# Altium PCB PCB1.PcbDoc
Units mm, origin at the board's own origin, x right, y up, seen from the top; angles counter-clockwise.
Board outline 68.96 x 54.74 mm, 2 copper layers (Top Layer, Bottom Layer); 22 components, 0 nets, 57 pads, 0 vias.
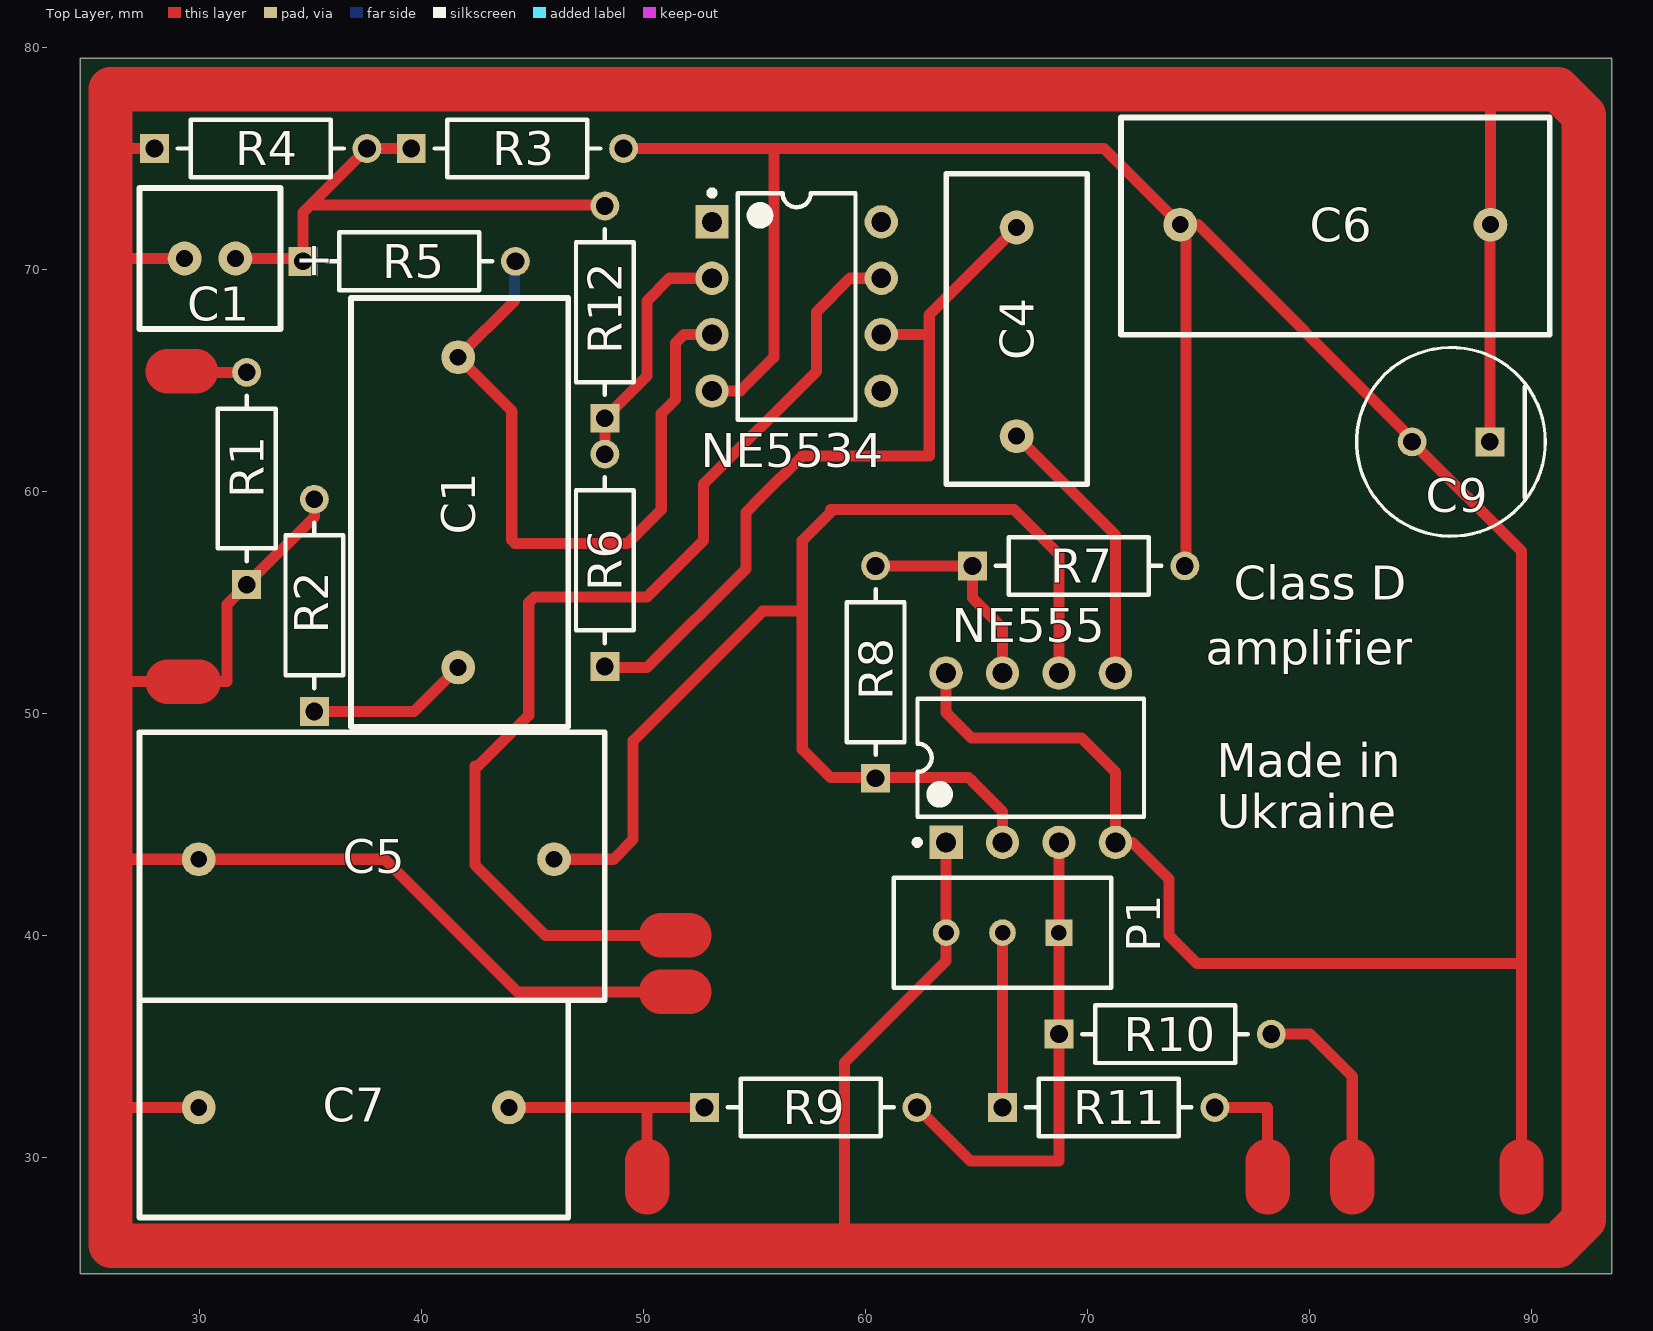
[diagram p0: Top Layer view]
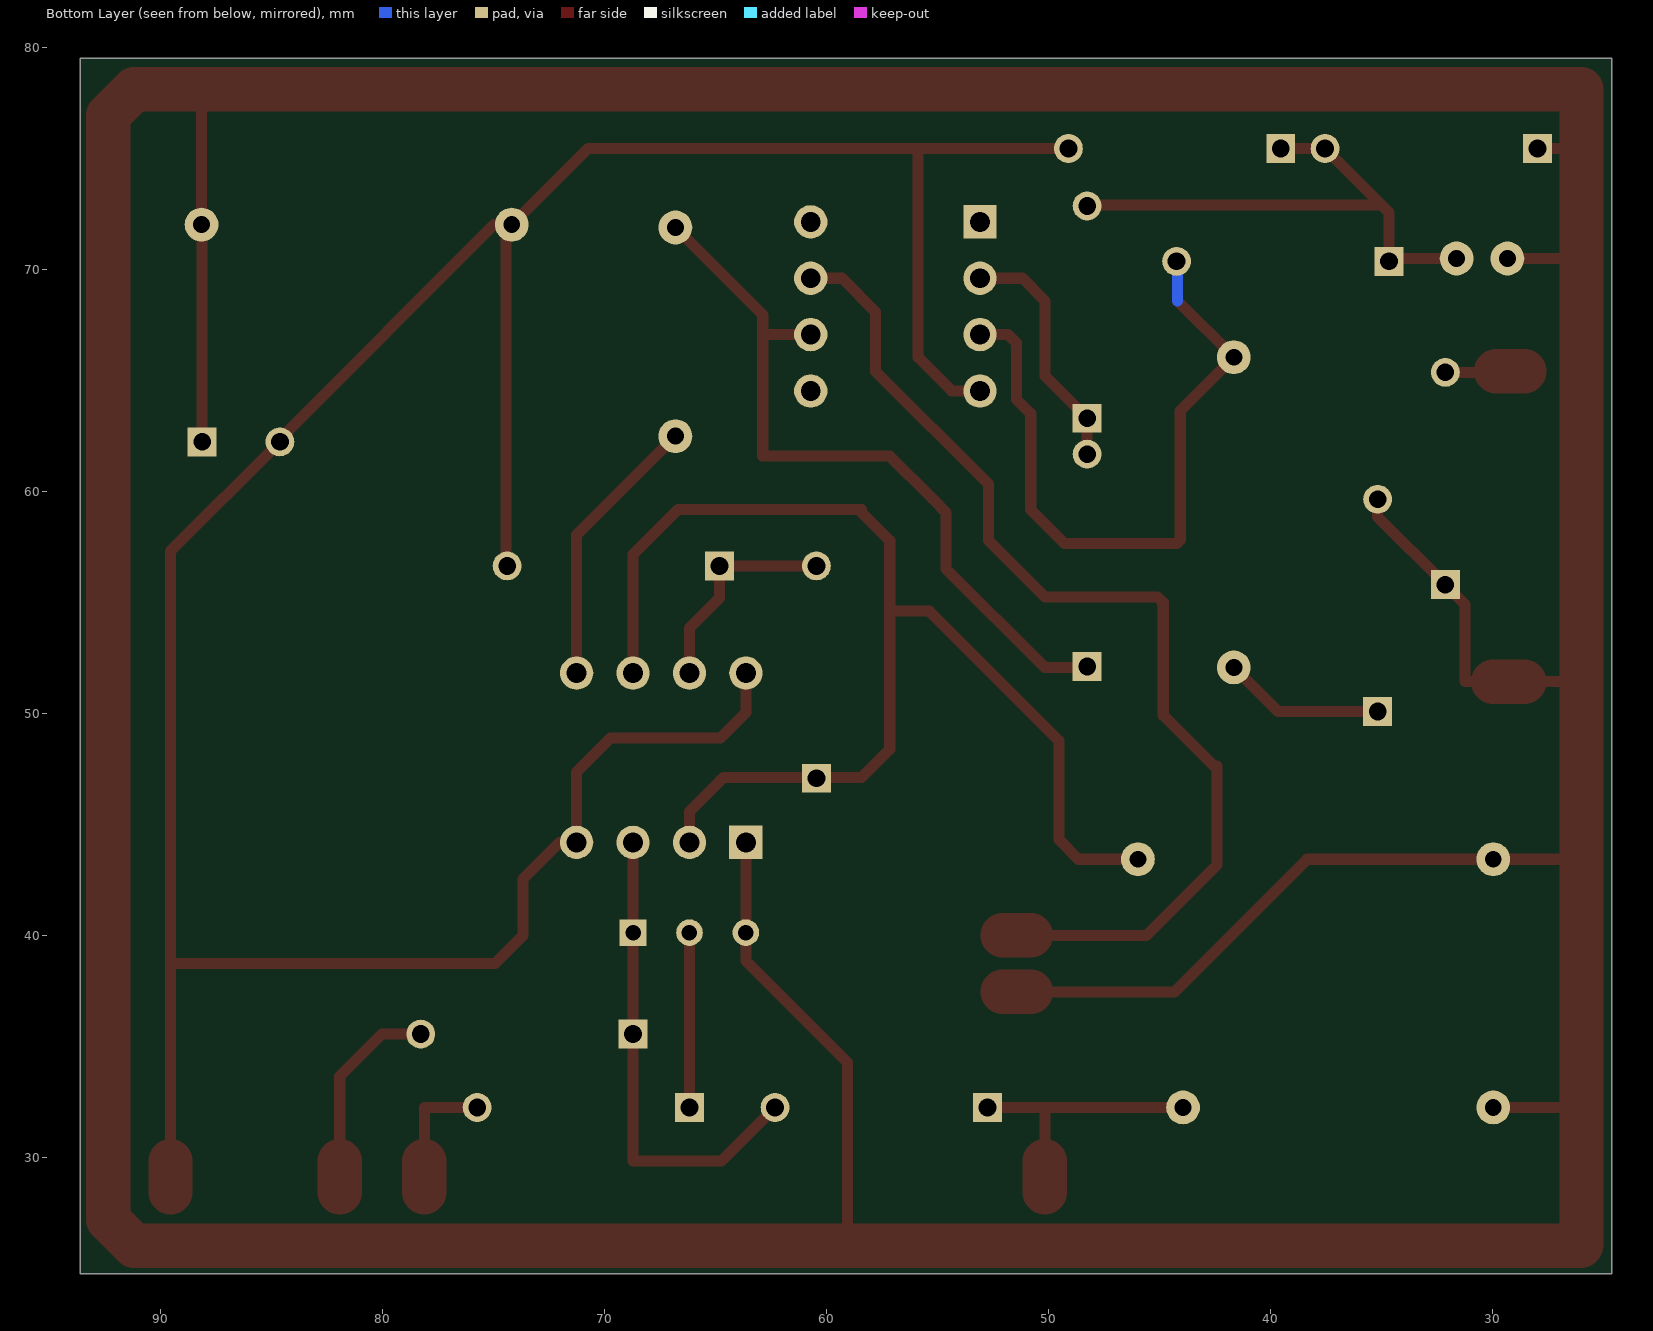
[diagram p1: Bottom Layer view, seen from below]

## Layer stack, top to bottom
Top Solder: solder mask 0.0102, Solder Resist, Dk 3.5
Top Layer: signal copper 0.0356
Dielectric 1: dielectric 0.32, FR-4, Dk 4.8
Bottom Layer: signal copper 0.0356
Bottom Solder: solder mask 0.0102, Solder Resist, Dk 3.5

## Board outline
24.638,24.765 93.599,24.765 93.599,79.502 24.638,79.502

## Design rules (kind name [scope] priority, off if disabled: settings)
Clearance [All] p1: gap=0.254 ignorepadtopadclearanceinfootprint=FALSE except(0: Arc-Hole Track-Hole SMDPad-Hole THPad-Hole Via-Hole Fill-Hole Poly-Hole Region-Hole Text-Hole)
PolygonConnect [All] p1: connectstyle=Relief reliefconductorwidth=0.254 reliefentries=4 polygonreliefangle="90 Angle" airgapwidth=0.254
RoutingVias [All] p1: holewidth=0.711 width=1.27 viastyle="Through Hole" minholewidth=0.711 minwidth=1.27 maxholewidth=0.711 maxwidth=1.27
SolderMaskExpansion [All] p1: expansion=0.102 istentingtop=FALSE
Width [All] p1: maxlimit=0.254 minlimit=0.254 preferedwidth=0.254
30 further rules are at their usual default settings.

## Components (designator, comment, footprint, x,y, rotation, side; value= is the part's Value field where it differs from the comment)
C1 "Comment" MPX153K2EB-Hitano 41.91,59.563 r90 top
C1 "Comment" ESX101M16B-Hitano 30.48,70.485 r0 top
C4 "Comment" MPX472K2FBA-Hitano 66.802,67.31 r90 top
C5 "Comment" MER684K2EB-Hitano 29.845,43.434 r0 top
C6 "Comment" MPX153K2EB-Hitano 81.661,71.755 r0 top
C7 "Comment" MPX154K2FB-Hitano 37.465,32.004 r0 top
C9 "Comment" FP-EEU-FC1V221L-MFG 86.36,62.23 r180 top
NE555 "Comment" P0008A 67.437,48.006 r90 top
NE5534 "Comment" P0008A 56.896,68.326 r0 top
P1 "Comment" FP-3296W-MFG 66.167,40.127 r90 top
R1 "Comment" FP-CF14-MFG 35.179,54.864 r90 top
R2 "Comment" FP-CF14-MFG 32.131,60.579 r90 top
R3 "Comment" FP-CF14-MFG 44.323,75.438 r0 top
R4 "Comment" FP-CF14-MFG 32.766,75.438 r0 top
R5 "Comment" FP-CF14-MFG 39.451,70.358 r0 top
R6 "Comment" FP-CF14-MFG 48.26,56.896 r90 top
R7 "Comment" FP-CF14-MFG 69.596,56.642 r0 top
R8 "Comment" FP-CF14-MFG 60.452,51.862 r90 top
R9 "Comment" FP-CF14-MFG 57.531,32.258 r0 top
R10 "Comment" FP-CF14-MFG 73.487,35.56 r0 top
R11 "Comment" FP-CF14-MFG 70.947,32.258 r0 top
R12 "Comment" FP-CF14-MFG 48.26,68.072 r90 top

## Footprints (in the part's own frame and the unit in brackets; to place one, negate y for a bottom-side part, rotate by r counter-clockwise, add the part's x,y. Pads: shape width x height; smd on the part's side, far side on the other; paste and mask are expansions set on the pad)
ESX101M16B-Hitano [mil]
  round 60 hole 30: 7(45,0) 8(-45,0)
  silkscreen extent -125,-125 125,125, body extent -124,-124 124,124, height 433
FP-3296W-MFG [mm]
  rect 1.2x1.2 hole 0.7 paste-1000 mask+0: 1(0.005,-2.54)
  round 1.2 hole 0.7 paste-1000 mask+0: 2(0.005,0) 3(0.005,2.54)
  silkscreen extent -2.48,-4.89 2.48,4.89, body extent -2.58,-4.99 2.58,4.99, height 0.25
FP-CF14-MFG [mm]
  rect 1.3x1.3 hole 0.8 paste-1000 mask+0: 1(-4.78,0)
  round 1.3 hole 0.8 paste-1000 mask+0: 2(4.78,0)
  silkscreen extent -3.73,-1.3 3.73,1.3, body extent -5.53,-1.4 5.53,1.4, height 0.25
FP-EEU-FC1V221L-MFG [mm]
  rect 1.3x1.3 hole 0.8 paste-1000 mask+0: 1(-1.75,0)
  round 1.3 hole 0.8 paste-1000 mask+0: 2(1.75,0)
  silkscreen extent -4.25,-4.25 4.25,4.25, body extent -4,-4 4,4, height 16.5
MER684K2EB-Hitano [mil]
  round 60 hole 30: 1(5,0) 2(635,0)
  silkscreen extent -100,-250 725,225, body extent -34,-197 675,177, height 827
MPX153K2EB-Hitano [mil]
  round 60 hole 30: 5(-295,10) 6(255,10)
  silkscreen extent -400,-185 360,200, body extent -374,-160 334,175, height 571
MPX154K2FB-Hitano [mil]
  round 60 hole 30: 5(-295,10) 6(255,10)
  silkscreen extent -400,-185 360,200, body extent -374,-160 334,175, height 571
MPX472K2FBA-Hitano [mil]
  round 60 hole 30: 3(180,0) 4(-190,0)
  silkscreen extent -275,-125 275,125, body extent -250,-98 242,98, height 433
P0008A [mm] "DIP, 8-Leads, Body 10.15x6.6mm, Pitch 2.54mm"
  rect 1.5x1.5 hole 0.9: 1(-3.81,3.81)
  round 1.5 hole 0.9: 2(-3.81,1.27) 3(-3.81,-1.27) 4(-3.81,-3.81) 5(3.81,-3.81) 6(3.81,-1.27) 7(3.81,1.27) 8(3.81,3.81)
  silkscreen extent -3.93,-5.1 2.65,5.23, body extent -3.95,-5.07 3.95,5.07, height 5.08

## Nets (pads, with @x,y where several pads share a name; then routed paths per layer and width w, separated by ;. In a path a pad name is that pad's centre, name@x,y a point inside that pad or via, vN(x,y) a via of type N, cw(c..) or ccw(c..) an arc to the next point about the centre after c; other vN are vias at no path point)
pads on no net: C1.5 C1.6 C1.7 C1.8 C4.3 C4.4 C5.1 C5.2 C6.5 C6.6 C7.5 C7.6 C9.1 C9.2 NE555.1 NE555.2 NE555.3 NE555.4 NE555.5 NE555.6 NE555.7 NE555.8 NE5534.1 NE5534.2 NE5534.3 NE5534.4 NE5534.5 NE5534.6 NE5534.7 NE5534.8 P1.1 P1.2 P1.3 R1.1 R1.2 R2.1 R2.2 R3.1 R3.2 R4.1 R4.2 R5.1 R5.2 R6.1 R6.2 R7.1 R7.2 R8.1 R8.2 R9.1 R9.2 R10.1 R10.2 R11.1 R11.2 R12.1 R12.2
copper on no net: | length 793.1
  Top Layer w0.254: 25.998,26.072 26.035,26.035 ; 25.998,78.09 26.014,78.105 ; 26.035,32.385 26.162,32.258 ; 29.845,65.405 29.891,65.359 ; 34.544,70.485 34.671,70.358 ; 37.846,78.867 37.973,78.74 38.227,78.486 57.277,78.486 ; 38.354,43.434 43.942,37.846 ; 42.418,47.625 42.545,47.625 ; 44.895,55.054 45.085,55.245 ; 48.26,52.116 48.306,52.07 ; 48.26,63.292 48.56,62.992 ; 58.42,59.055 58.42,59.182 ; 60.417,47.117 60.452,47.082 ; 62.23,32.339 62.311,32.258 ; 64.643,47.117 64.77,46.99 ; 74.168,72.009 74.422,71.755 ; 74.376,56.642 74.422,56.688 ; 81.788,29.972 81.915,29.845 ; 88.11,71.981 88.138,72.009 ; 52.451,69.596 53.086,69.596 52.451,69.596
  Top Layer w0.5: 25.908,51.435 28.575,51.435 ; 25.908,70.485 29.337,70.485 ; 25.908,75.438 27.986,75.438 ; 25.998,43.434 29.972,43.434 38.354,43.434 44.323,37.465 49.53,37.465 50.8,37.465 ; 26.162,32.258 29.972,32.258 ; 29.891,65.359 32.131,65.359 ; 29.972,51.435 31.242,51.435 31.242,54.91 32.131,55.799 35.179,58.847 35.179,59.644 ; 31.623,70.485 34.544,70.485 ; 34.671,70.358 34.671,72.563 37.546,75.438 39.543,75.438 ; 35.052,72.898 48.26,72.898 ; 35.179,50.084 39.67,50.084 41.656,52.07 ; 42.418,47.625 42.418,43.18 45.212,40.386 45.593,40.005 49.53,40.005 50.8,40.005 ; 42.545,47.625 44.831,49.911 44.831,54.991 44.958,55.118 ; 43.942,32.258 50.165,32.258 ; 44.196,68.58 41.656,66.04 44.069,63.627 44.069,57.807 44.218,57.658 49.276,57.658 50.8,59.182 50.8,63.5 51.435,64.135 51.435,66.675 51.816,67.056 53.086,67.056 ; 45.085,55.245 50.165,55.245 52.705,57.785 52.705,60.325 57.785,65.405 57.785,68.072 59.309,69.596 60.706,69.596 ; 45.974,43.434 48.641,43.434 49.53,44.323 49.53,44.831 49.53,48.768 55.372,54.61 57.15,54.61 ; 48.26,61.676 48.26,63.292 50.165,65.197 50.165,68.58 51.181,69.596 52.451,69.596 ; 48.306,52.07 50.165,52.07 54.61,56.515 54.61,59.055 55.245,59.69 57.15,61.595 59.69,61.595 62.865,61.595 62.865,67.056 ; 49.103,75.438 70.739,75.438 74.168,72.009 74.958,72.009 84.61,62.357 ; 50.165,29.845 50.165,32.258 ; 52.751,32.258 50.165,32.258 ; 53.086,64.516 54.356,64.516 55.88,66.04 55.88,75.438 ; 58.42,59.055 57.15,57.785 57.15,48.387 58.42,47.117 60.417,47.117 64.643,47.117 ; 58.42,59.182 66.675,59.182 68.707,57.15 68.707,55.88 68.707,51.816 ; 59.055,26.289 59.055,34.29 63.627,38.862 63.627,40.132 63.627,44.196 ; 60.452,56.642 64.816,56.642 64.816,55.199 66.167,53.848 66.167,51.816 ; 60.706,67.056 62.865,67.056 ; 62.311,32.258 64.724,29.845 68.707,29.845 68.707,35.56 68.707,40.132 68.707,44.196 ; 63.627,51.816 63.627,50.165 63.627,50.038 64.77,48.895 69.723,48.895 71.247,47.371 71.247,45.593 71.247,44.196 72.009,44.196 73.66,42.545 73.66,40.005 74.93,38.735 89.535,38.735 ; 64.77,46.99 66.167,45.593 66.167,44.196 ; 66.167,32.258 66.167,40.132 ; 66.802,62.484 71.247,58.039 71.247,51.816 ; 66.802,71.882 62.865,67.945 62.865,67.056 ; 74.422,56.688 74.422,57.658 74.422,71.755 ; 75.727,32.258 78.105,32.258 78.105,29.845 ; 78.267,35.56 79.502,35.56 80.01,35.56 81.915,33.655 81.915,31.05 81.915,29.972 ; 84.61,62.23 89.535,57.305 89.535,29.845 ; 88.11,62.357 88.11,71.981 ; 88.138,72.009 88.138,78.105
  Top Layer w2: 25.998,26.072 25.998,32.385 25.998,43.434 25.998,70.485 25.998,75.438 25.998,78.09 ; 26.014,78.105 27.432,78.105 32.512,78.105 38.227,78.105 57.277,78.105 88.138,78.105 91.163,78.105 92.335,76.933 92.335,27.207 91.163,26.035 59.055,26.035 26.035,26.035 ; 28.575,51.435 29.972,51.435 ; 28.575,65.405 29.845,65.405 ; 50.165,28.575 50.165,28.448 50.165,29.845 ; 50.8,37.465 52.07,37.465 ; 50.8,40.005 52.07,40.005 ; 78.105,28.448 78.105,29.845 ; 81.915,28.448 81.915,29.845 ; 89.535,28.448 89.535,29.845
  Bottom Layer w0.254: 44.196,70.323 44.231,70.358
  Bottom Layer w0.5: 44.196,68.58 44.196,70.323

## Other copper
Top Layer:

## Silkscreen, mask and mechanical layers (free items; w line width, h text height)
Top Overlay:
  text "Class D" at 76.581,55.118 h1.52
  text "amplifier" at 75.311,52.197 h1.52
  text "Made in" at 75.819,47.117 h1.52
  text "Ukraine" at 75.819,44.831 h1.52

## Text inside footprints (layer, text, board x,y; h text height)
C1: Top Overlay "+" at 34.29,69.723 h1.52